# Altium PCB S6XT10W.PcbDoc (part 2 of 2)
Units mm, origin at the board's own origin, x right, y up, seen from the top; angles counter-clockwise.
Board outline 35 x 65.67 mm, 5 copper layers (Top Layer, Mid-Layer 2, Mid-Layer 6, Mid-Layer 13, Bottom Layer); 90 components, 58 nets, 296 pads, 188 vias.
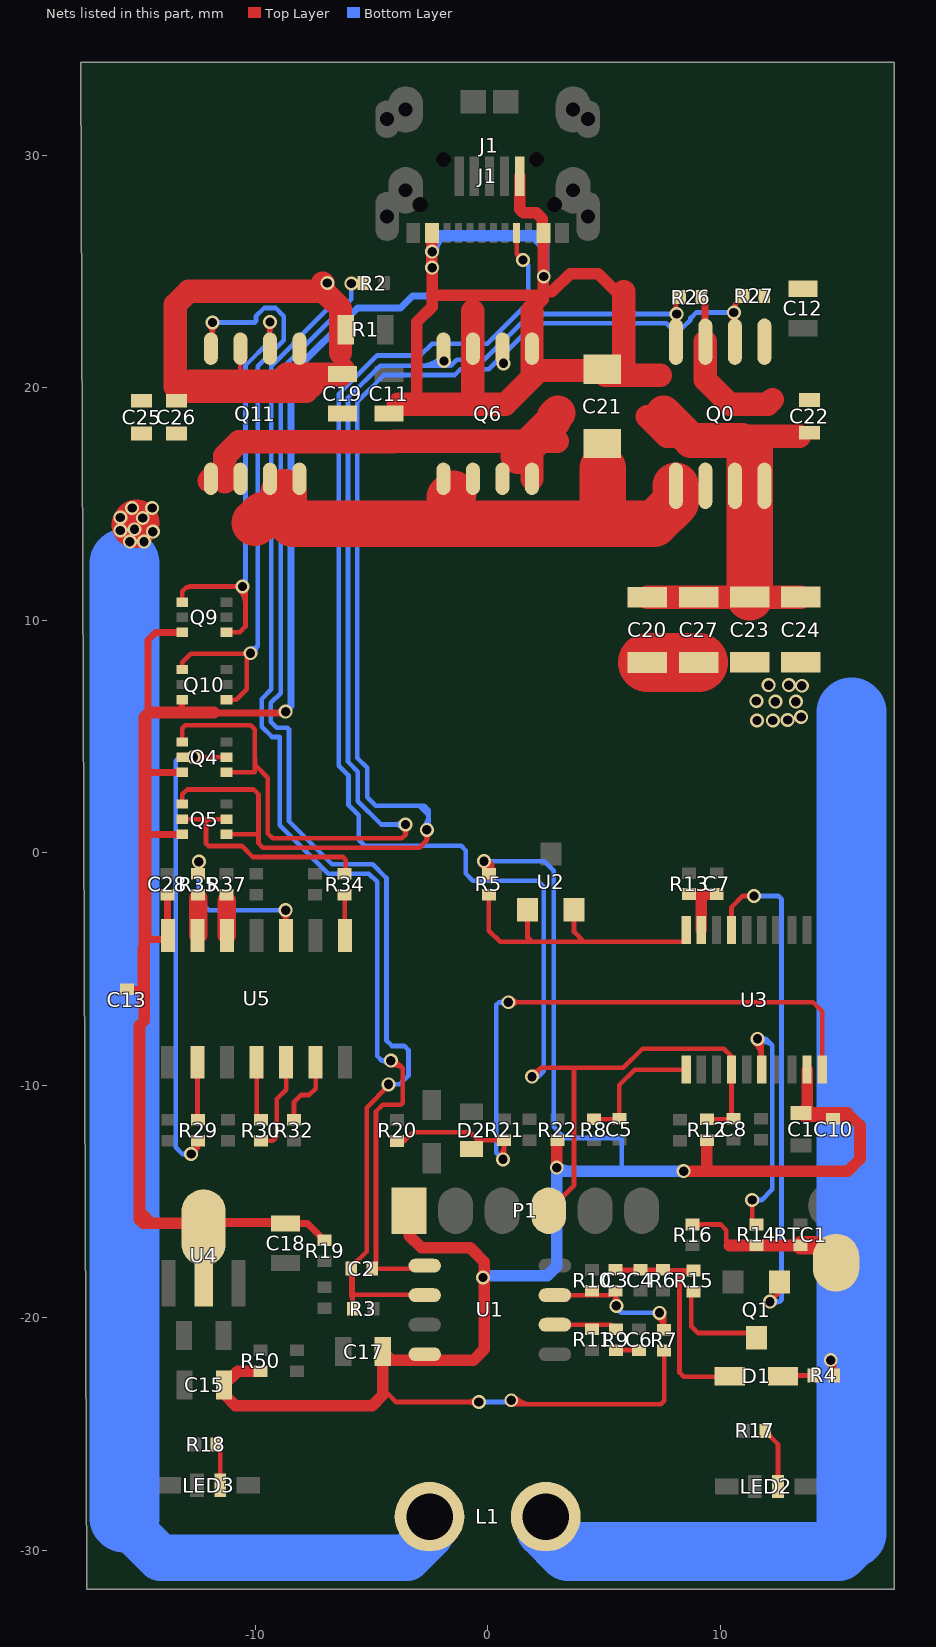
[diagram p3: the nets of this part, all layers, seen from the top]

## Via types
v1: diameter 0.6, hole 0.4, Top Layer to Bottom Layer, 188 vias

## Nets (pads, with @x,y where several pads share a name; then routed paths per layer and width w, separated by ;. In a path a pad name is that pad's centre, name@x,y a point inside that pad or via, vN(x,y) a via of type N, cw(c..) or ccw(c..) an arc to the next point about the centre after c; other vN are vias at no path point) (continued)
NetC2_2: C2.2 R2.1 R3.1 U1.6 | length 56.4
  Top Layer w0.2: v1(-5.86,24.486) -5.835,24.511 R2.1@-5.352,24.511 ccw(c-5.352,24.026) v1@-5.712,24.351 ; R3.1@-5.809,-19.609 -5.809,-19.13 -5.86,-19.079 ; v1@-5.719,24.627 ccw(c-5.439,24.907) R2.1@-5.439,24.511 ; v1@-4.267,-10.026 -5.201,-10.96 -5.201,-17.148 -5.86,-17.807 C2.2@-5.86,-17.882 ; U1.6@-2.707,-19.026 -2.725,-19.009 -5.79,-19.009 -5.809,-19.029 ; -5.86,-19.079 C2.2@-5.86,-17.882 ; -5.86,-19.079 -5.809,-19.029 ; C2.2@-5.86,-17.882 -5.809,-17.932 -5.809,-19.029
  Bottom Layer w0.2: v1(-5.86,24.486) -5.86,23.819 -8.906,20.773 -8.906,6.867 -9.322,6.452 -9.322,5.643 -9.065,5.385 -8.611,5.385 -8.544,5.319 -8.544,1.356 -6.693,-0.495 -4.94,-0.495 -4.352,-1.083 -4.352,-8.068 -4.115,-8.306 -3.581,-8.306 -3.405,-8.482 -3.405,-9.582 -3.78,-9.957 v1(-4.267,-9.957)
NetC3_1: C3.1 C4.2 D1.2 R6.2 R15.1 | length 12.2
  Top Layer w0.2: R6.2@7.645,-17.835 R6.2@7.543,-17.937 C4.2@6.568,-17.937 C3.1@5.493,-17.937 5.521,-17.965 R15.1@8.578,-17.965 ; R15.1@8.763,-17.965 R15.1@8.578,-17.965 ; D1.2@10.417,-22.504 10.392,-22.53 8.433,-22.53 8.255,-22.352 8.255,-18.288 R15.1@8.578,-17.965
NetC3_2: C3.2 R7.2 R10.1 U1.3 | length 8.9
  Top Layer w0.2: U1.3@2.893,-19.026 5.303,-19.026 C3.2@5.493,-18.837 5.493,-19.158 ; v1@5.396,-19.34 ccw(c5.161,-19.106) 5.493,-19.106 ; v1@5.412,-19.326 ccw(c5.278,-19.158) 5.493,-19.158 ; C3.2@5.493,-18.892 ccw(c6.127,-18.892) v1@5.679,-19.34 ; v1(5.537,-19.482) 5.537,-19.202 5.493,-19.158 ; v1@5.592,-19.289 cw(c5.629,-19.158) 5.493,-19.158 ; v1@7.282,-19.954 cw(c6.902,-20.533) R7.2@7.595,-20.533 ; R7.2@7.595,-20.505 v1@7.595,-19.99 ; 7.595,-20.163 ccw(c7.145,-20.163) v1(7.391,-19.787) v1@7.595,-19.99 ; v1@7.595,-19.964 v1@7.595,-19.99
  Bottom Layer w0.2: v1@5.537,-19.682 cw(c5.537,-19.919) 5.705,-19.751 ; v1(5.537,-19.482) 5.537,-19.583 5.74,-19.787 ; v1@5.712,-19.579 ccw(c5.863,-19.664) 5.74,-19.787 ; v1(7.391,-19.787) 5.74,-19.787
NetC5_2: C5.2 R8.1 U3.1 | length 5.7
  Top Layer w0.2: R8.1@4.572,-11.463 5.639,-11.463 C5.2@5.664,-11.437 5.664,-9.987 6.326,-9.325 U3.1@8.54,-9.325
NetC6_2: C6.2 R9.1 | length 1
  Top Layer w0.2: R9.1@5.518,-21.387 C6.2@6.518,-21.387
NetC7_1: C7.1 R13.1 U3.19 | length 2.8
  Top Layer w0.2: R13.1@8.661,-1.771 9.246,-1.771 9.19,-1.826
  Top Layer w0.5: U3.19@9.19,-3.325 9.19,-1.826 ; 9.246,-1.771 C7.1@9.855,-1.771
NetC20_2: C20.2 C22.1 C23.2 C24.2 C26.2 C27.2 Q0.C1 Q6.C1 Q11.C2 | length 45.6
  Top Layer w1: Q11.C2@-11.989,16.004 Q11.C2@-11.905,16.088 ; -11.303,15.951 -11.303,17.069 -10.693,17.678 -4.064,17.678 -4.042,17.7 1.8,17.7 ; Q6.C1@1.905,16.088 1.905,17.551 1.854,17.602 1.778,17.678 1.8,17.7 ; 2.87,18.771 1.8,17.7 ; 2.991,17.7 1.952,17.7 1.8,17.7 ; 6.858,18.771 7.71,17.918 8.574,17.918 C22.1@13.411,17.918 ; C20.2@6.87,10.993 6.876,10.999 C23.2@11.27,10.998 C24.2@13.47,10.999 ; 10.998,17.678 11.27,17.406
  Top Layer w1.5: 1.295,17.043 1.854,17.602 1.952,17.7 2.837,18.585 ; 2.87,18.771 3.023,18.923 ; 7.569,18.923 8.574,17.918 8.754,17.738 10.939,17.738 10.998,17.678
  Top Layer w2: C23.2@11.27,10.998 11.27,17.406
NetD1_1: D1.1 R4.1 | length 1.3
  Top Layer w0.2: D1.1@12.707,-22.504 12.732,-22.479 R4.1@14.003,-22.479
NetFU1_1: 
NetLED2_1: LED2.1 R17.2 | length 2.6
  Top Layer w0.2: R17.2@11.939,-24.867 11.939,-24.885 12.489,-25.435 LED2.1@12.489,-27.254
NetLED3_1: LED3.1 R18.2 | length 1.8
  Top Layer w0.2: R18.2@-11.666,-25.445 -11.5,-25.61 LED3.1@-11.5,-27.203
NetQ1_C: Q1.C R15.2 | length 4.5
  Top Layer w0.2: R15.2@8.763,-18.865 8.763,-20.371 9.042,-20.65 11.348,-20.65 Q1.C@11.557,-20.86
NetQ9_1: Q9.1 Q9.4 Q11.B1 | length 20.7
  Top Layer w0.2: Q9.4@-13.133,10.785 -13.133,11.251 -12.954,11.43 -12.852,11.43 -12.827,11.455 -10.414,11.455 -10.414,9.739 -10.668,9.485 Q9.1@-11.233,9.485 ; v1@-10.682,11.314 cw(c-11.33,10.666) -10.414,10.666 ; v1(-10.541,11.455) cw(c-10.848,11.149) -10.414,11.149 ; v1@-9.506,22.693 cw(c-9.848,22.352) -9.365,22.352 cw(c-8.882,22.352) v1@-9.224,22.693 ; Q11.B1@-9.365,21.688 v1(-9.365,22.835)
  Bottom Layer w0.2: v1@-10.414,11.455 -10.414,20.963 -9.365,22.012 v1(-9.365,22.835)
NetQ10_1: Q10.1 Q10.4 Q11.B2 | length 27.1
  Top Layer w0.2: Q10.4@-13.133,7.889 -13.133,8.203 -12.776,8.56 -10.363,8.56 -10.363,7.036 -10.81,6.589 Q10.1@-11.233,6.589 ; v1@-11.978,22.668 cw(c-12.319,22.326) -11.836,22.326 cw(c-11.354,22.326) v1@-11.695,22.668 ; Q11.B2@-11.905,21.688 -11.836,21.757 v1(-11.836,22.809)
  Bottom Layer w0.2: v1(-11.836,22.809) -10.016,22.809 -9.965,22.86 -9.965,23.083 -9.614,23.435 -9.116,23.435 -8.765,23.083 -8.765,22.046 -9.881,20.93 -9.881,8.902 ; v1(-10.198,8.585) -9.881,8.902 ; v1@-10.187,8.785 ccw(c-10.165,9.187) -9.881,8.902 ; v1@-9.998,8.596 cw(c-9.596,8.618) -9.881,8.902
NetR5_2: R5.2 U2.2 U2.3 U3.20 | length 13.7
  Top Layer w0.2: R5.2@0.051,-1.796 0.051,-3.342 0.533,-3.825 1.905,-3.825 ; U2.2@1.718,-2.445 1.718,-3.638 1.905,-3.825 ; U2.3@3.718,-2.445 3.718,-3.403 4.14,-3.825 ; U3.20@8.54,-3.325 8.54,-3.692 8.407,-3.825 4.14,-3.825 ; 1.905,-3.825 4.14,-3.825
NetR9_2: R9.2 R11.2 U1.2 | length 2.7
  Top Layer w0.2: U1.2@2.893,-20.296 5.328,-20.296 R9.2@5.518,-20.487
NetR14_1: pad.1@14.986,-17.628 R14.1 R16.2 RTC1.2 | length 6.9
  Top Layer w0.2: R16.2@8.814,-15.984 10.015,-15.984 10.262,-16.231 10.262,-16.764 10.389,-16.891 ; RTC1.2@13.455,-16.891 RTC1.2@13.462,-16.884 ; 14.101,-16.884 pad.1@14.732,-17.515
  Top Layer w0.5: 10.389,-16.891 RTC1.2@13.455,-16.891
  Top Layer w0.8: RTC1.2@13.462,-16.884 14.101,-16.884
NetR29_1: R29.1 U5.2 | length 2.5
  Top Layer w0.2: U5.2@-12.477,-9.006 -12.477,-11.463 R29.1@-12.452,-11.488
NetR30_1: R30.1 U5.4 | length 2.6
  Top Layer w0.2: U5.4@-9.937,-9.006 -9.937,-11.305 R30.1@-9.754,-11.488
NetR30_2: R30.2 U5.5 | length 3.7
  Top Layer w0.2: R30.2@-9.754,-12.388 -9.238,-12.388 -9.068,-12.217 -9.068,-10.586 -8.667,-10.185 U5.5@-8.667,-9.398
NetR32_1: R32.1 U5.6 | length 3.1
  Top Layer w0.2: R32.1@-8.331,-11.488 -8.331,-10.731 -8.014,-10.414 -7.671,-10.414 -7.397,-10.14 U5.6@-7.397,-9.006
NetR34_1: R34.1 U5.8 | length 1.8
  Top Layer w0.2: R34.1@-6.152,-1.806 -6.152,-3.531 U5.8@-6.127,-3.556
NetR35_1: R35.1 U5.10 | length 8.7
  Top Layer w0.2: v1@-12.562,-0.522 cw(c-12.828,-0.789) R35.1@-12.452,-0.789 ; v1(-12.421,-0.381) -12.452,-0.412 R35.1@-12.452,-0.906 cw(c-11.939,-0.906) v1@-12.285,-0.528 ; v1@-8.828,-2.605 cw(c-9.231,-3.008) U5.10@-8.661,-3.008 ; U5.10@-8.667,-3.556 -8.661,-3.55 v1@-8.661,-2.464 ; U5.10@-8.661,-2.885 cw(c-8.265,-2.885) v1@-8.545,-2.605
  Bottom Layer w0.2: v1(-12.421,-0.381) -12.421,-2.032 -11.989,-2.464 v1(-8.687,-2.464)
NetR35_2: R35.2 U5.13 | length 1.6
  Top Layer w0.3: U5.13@-12.477,-3.556 U5.13@-12.452,-3.531
  Top Layer w0.8: U5.13@-12.452,-3.531 R35.2@-12.452,-1.956
NetR37_1: R37.1 U5.12 | length 1.5
  Top Layer w0.3: U5.12@-11.227,-3.536 U5.12@-11.207,-3.556
  Top Layer w0.8: U5.12@-11.227,-3.536 -11.227,-2.057
NRST: C8.1 J1.9 P1.4 R12.2 U3.4 | length 72.3
  Top Layer w0.2: J1.9@1.25,26.661 1.25,25.776 ; v1@1.327,25.535 ccw(c1.055,25.581) 1.25,25.776 ; v1@1.491,25.699 cw(c1.445,25.97) 1.25,25.776 ; v1(1.524,25.502) 1.25,25.776 ; v1(1.905,-9.627) 2.286,-9.246 3.718,-9.246 ; v1@1.905,-9.427 ccw(c1.905,-8.944) 2.246,-9.285 ccw(c2.588,-9.627) v1@2.105,-9.627 ; P1.4@2.626,-15.392 3.718,-14.3 3.718,-9.246 ; R12.2@9.43,-11.463 10.385,-11.463 C8.1@10.49,-11.357 ; C8.1@10.578,-11.445 C8.1@10.49,-11.357 ; 3.718,-9.246 5.84,-9.246 6.66,-8.425 10.165,-8.425 10.49,-8.751 U3.4@10.49,-9.325 C8.1@10.49,-11.357
  Bottom Layer w0.2: v1(1.524,25.502) v1@1.651,25.375 ; v1@1.651,25.508 v1@1.651,25.375 ; v1@2.004,-9.453 ccw(c2.173,-9.158) 2.413,-9.398 ; 2.228,-9.583 cw(c2.038,-9.394) v1(1.905,-9.627) 2.184,-9.627 2.413,-9.398 ; v1@1.651,25.375 1.753,25.273 1.753,23.665 -0.017,21.895 -2.39,21.895 -2.891,21.394 -4.75,21.394 -6.406,19.738 -6.406,3.749 -5.982,3.325 -5.982,2.056 -5.547,1.621 -5.547,0.568 -5.283,0.305 -1.143,0.305 -0.94,0.102 -0.94,-0.889 -0.635,-1.194 2.159,-1.194 2.413,-1.448 2.413,-9.398
QC20: D2.1 R20.1 R21.2 U3.10 | length 31.7
  Top Layer w0.2: R20.1@-3.895,-12.392 -3.578,-12.392 -3.2,-12.014 -0.762,-12.014 -0.415,-12.361 ; D2.1@-0.695,-12.741 -0.695,-12.641 -0.415,-12.361 ; v1@0.519,-13.041 ccw(c0.07,-12.592) R21.2@0.705,-12.592 ; v1@0.705,-13.101 R21.2@0.705,-12.361 -0.415,-12.361 ; 0.705,-12.807 ccw(c1.036,-12.807) v1@0.802,-13.041 ; v1(0.889,-6.426) 13.995,-6.426 14.39,-6.821 U3.10@14.39,-9.325 ; v1@1.03,-6.568 cw(c1.372,-6.909) 1.372,-6.426 cw(c1.372,-5.943) v1@1.03,-6.285
  Bottom Layer w0.2: v1(0.66,-13.183) 0.378,-12.9 0.378,-6.538 0.489,-6.426 ; v1@0.729,-6.546 ccw(c0.489,-6.725) 0.489,-6.426 ; v1@0.729,-6.306 cw(c0.489,-6.127) 0.489,-6.426 ; v1(0.889,-6.426) 0.489,-6.426
RUN_POWER: R14.2 U3.6 | length 14
  Top Layer w0.2: v1(11.379,-14.935) 11.379,-15.806 R14.2@11.557,-15.984 ; v1@11.466,-8.142 cw(c10.684,-8.925) U3.6@11.79,-8.925 ; U3.6@11.79,-9.325 11.79,-8.184 v1(11.608,-8.001) cw(c11.167,-8.442) 11.79,-8.442
  Bottom Layer w0.2: v1(11.379,-14.935) 11.786,-14.935 ; v1@11.538,-15.057 cw(c11.786,-15.248) 11.786,-14.935 ; v1@11.538,-14.813 ccw(c11.786,-14.622) 11.786,-14.935 ; v1@11.692,-8.182 cw(c11.897,-8.626) 12.243,-8.28 ; v1@11.779,-8.105 cw(c11.964,-8.217) 11.964,-8.001 ; v1@11.779,-7.897 ccw(c11.964,-7.785) 11.964,-8.001 ; 12.04,-8.078 ccw(c11.769,-8.349) v1(11.608,-8.001) 11.964,-8.001 ; 11.786,-14.935 12.243,-14.478 12.243,-8.28 ; 11.964,-8.001 12.243,-8.28
SBWTDIO: 
SIGN: C20.1 C23.1 C24.1 C27.1 L1.2 R4.2 | length 53.8
  Top Layer w0.2: v1@14.64,-21.981 cw(c14.268,-22.495) R4.2@14.903,-22.495 ; R4.2@14.903,-22.479 14.903,-21.964 v1(14.757,-21.819) cw(c14.551,-22.103) 14.903,-22.103
  Top Layer w2.54: C20.1@6.87,8.193 C27.1@9.071,8.193
  Bottom Layer w2.54: L1.2@2.5,-28.551 2.5,-29.091 3.463,-30.054 15.088,-30.054 15.879,-29.262
  Bottom Layer w3: 15.646,-29.261 15.646,6.045
  other v1: 11.582,5.69 12.268,5.69 12.903,5.715 13.487,5.842 12.375,6.502 13.259,6.502 11.557,6.528 13.513,7.188 12.09,7.214 12.954,7.214
SWITCH: Q1.B U3.17 | length 22.8
  Top Layer w0.2: U3.17@10.49,-3.325 10.49,-2.337 10.973,-1.854 v1(11.455,-1.854) ; v1(12.141,-19.304) 12.557,-18.888 Q1.B@12.557,-18.46
  Bottom Layer w0.2: v1(11.455,-1.854) 12.497,-1.854 12.643,-2 12.643,-19.228 12.567,-19.304 ; v1(12.141,-19.304) 12.567,-19.304 ; v1@12.295,-19.432 cw(c12.567,-19.657) 12.567,-19.304 ; v1@12.295,-19.176 ccw(c12.567,-18.951) 12.567,-19.304
TX_GND: C2.1 C19.2 C25.1 C26.1 Q11.E1 Q11.E2 R1.2 U1.5 | length 83.8
  Top Layer w0.2: Q11.E2@-10.635,21.688 -10.635,20.288 -10.635,19.893 -10.592,19.85 ; v1(-4.166,-8.941) -3.988,-8.941 -3.658,-9.271 -3.658,-10.766 -3.734,-10.842 -4.5,-10.842 -4.508,-10.833 -4.801,-11.125 -4.801,-17.722 C2.1@-4.96,-17.882 -2.832,-17.882 U1.5@-2.707,-17.756 ; v1@-4.122,-9.136 cw(c-4.013,-9.626) -3.658,-9.271
  Top Layer w1: -12.77,20.288 -10.635,20.288 -8.951,20.288 ; v1@-7.096,24.511 ccw(c-6.322,24.511) -6.87,23.964 ; -6.325,21.514 -6.325,23.419 -7.061,24.155 -12.852,24.155 -13.437,23.571 -13.437,20.041 -13.246,19.85 -10.592,19.85 -7.798,19.85 -7.533,20.115 -7.533,20.127 -7.372,20.288 ; C19.2@-6.198,20.777 C19.2@-6.375,20.6 ; -8.951,20.288 -7.372,20.288 ; -8.951,20.288 -8.639,20.6 C19.2@-6.375,20.6 ; -7.372,20.288 -7.123,20.537 C19.2@-6.437,20.537 ; C19.2@-6.437,20.537 -6.313,20.537 C19.2@-6.25,20.6 C19.2@-6.375,20.6 ; C19.2@-6.437,20.537 C19.2@-6.375,20.6
  Bottom Layer w0.2: v1(-6.896,24.511) -6.756,24.371 -6.756,23.535 -8.365,21.927 -8.365,21.88 -9.306,20.939 -9.306,7.033 -9.722,6.617 -9.722,5.432 -9.276,4.985 -8.944,4.985 -8.944,1.19 -6.859,-0.895 -5.105,-0.895 -4.752,-1.248 -4.752,-8.734 -4.755,-8.738 -4.552,-8.941 ; v1@-4.329,-9.056 ccw(c-4.552,-9.215) -4.552,-8.941 ; v1@-4.329,-8.825 cw(c-4.552,-8.667) -4.552,-8.941 ; v1(-4.166,-8.941) -4.552,-8.941
TX_VCC: C11.1 C12.1 C13.1 C18.1 C19.1 C21.2 C22.2 C28.2 J1.1@1.376,29.11 J1.2@-2.4,26.661 J1.11 Q0.E1 Q0.E2 Q4.6 Q5.6 Q6.E1 Q6.E2 Q9.6 Q10.6 R19.2 R26.1 R27.2 U4.Vin U5.14 | length 164.4
  Top Layer w0.3: C13.1@-15.519,-5.875 -14.986,-5.875 ; C28.2@-13.777,-1.806 -13.777,-3.526 U5.14@-13.747,-3.556 -13.925,-3.734 -14.427,-3.734 ; Q5.6@-13.133,0.798 -14.583,0.798 -14.605,0.776 ; Q4.6@-13.133,3.465 -14.547,3.465 -14.605,3.523 ; Q10.6@-13.133,6.589 -13.157,6.564 -13.157,6.036 -13.157,6.005 ; Q9.6@-13.133,9.485 -14.275,9.485 -14.605,9.154 -14.605,6.005 ; U4.Vin@-12.217,-16.123 -12.034,-15.939 C18.1@-8.687,-15.939 ; v1@-8.687,6.005 -13.157,6.005 ; R19.2@-7.01,-16.67 -7.741,-15.939 -8.306,-15.939 -8.396,-15.85 -14.402,-15.85 -14.869,-15.382 -14.869,-7.311 -14.869,-5.798 ; R26.1@9.188,23.901 9.188,23.782 9.347,23.622 9.347,22.006 Q0.E2@9.365,21.988 ; -14.986,-5.875 -14.91,-5.798 -14.91,-4.902 ; -14.986,-5.875 -14.946,-5.875 -14.869,-5.798 ; -14.91,-4.902 -14.91,-4.084 -14.769,-3.944 -14.56,-3.734 -14.427,-3.734 ; -14.91,-4.902 -14.869,-4.943 -14.869,-5.798 ; -14.605,0.776 -14.605,-3.556 -14.427,-3.734 ; -14.605,0.776 -14.605,3.523 ; -14.605,3.523 -14.605,6.005 ; -14.605,6.005 -13.157,6.005
  Top Layer w0.5: U4.Vin@-12.034,-15.939 -14.82,-15.939 -14.986,-15.773 -14.986,-7.428 -14.869,-7.311 -14.769,-7.211 -14.769,-3.944 -14.769,5.841 -14.605,6.005 -14.574,6.036 -13.157,6.036 -11.766,6.036 ; -2.87,19.3 -3.048,19.478 -3.048,22.835 -2.388,23.495 -2.388,23.978 ; -2.4,23.978 -2.388,23.978 ; v1@-2.4,25.171 J1.2@-2.4,26.661 ; v1(-2.388,25.171) -2.388,23.978 ; J1.1@1.376,29.11 1.376,27.684 1.524,27.536 2.086,27.536 2.35,27.272 2.35,26.711 J1.11@2.4,26.661 2.4,24.13 ; 1.905,23.306 2.4,23.801 2.4,24.13 ; 2.388,23.978 -2.388,23.978 ; 5.85,24.151 5.515,24.151 4.751,24.915 3.549,24.915 2.764,24.13 2.4,24.13
  Top Layer w1: -3.85,19.3 -2.87,19.3 -0.685,19.3 ; -0.635,23.306 Q6.E2@-0.635,21.688 -0.635,19.35 -0.685,19.3 ; 1.905,23.306 Q6.E1@1.905,21.688 1.905,20.75 2.212,20.75 ; C21.2@5.055,20.548 7.42,20.548 ; 5.85,24.151 5.85,22.5 5.85,21.1 5.5,20.75 2.212,20.75 ; Q0.E2@9.365,21.988 9.365,20.349 10.414,19.3 12.05,19.3 12.25,19.5 ; -0.685,19.3 0.762,19.3 2.212,20.75
  Bottom Layer w0.3: v1@-8.661,6.121 -8.456,6.327 -8.456,20.587 -5.599,23.444 -3.74,23.444 -3.239,23.945 -2.489,23.945 -2.388,24.046 v1(-2.388,25.171) ; v1@-2.494,25.065 cw(c-2.75,24.809) -2.388,24.809 cw(c-2.025,24.809) v1@-2.282,25.065
  Bottom Layer w0.5: v1(-2.388,25.857) -2.388,26.187 -2.032,26.543 2.032,26.543 2.413,26.162 v1(2.413,24.79) ; v1@-2.338,25.857 cw(c-1.42,25.857) -2.069,26.506
  other v1: -8.687,6.071
UA: Q0.B2 Q4.1 Q4.4 Q6.B2 R26.2 | length 58.2
  Top Layer w0.2: Q4.4@-13.133,4.765 -13.133,5.364 -13.01,5.486 -10.191,5.486 -10.014,5.309 -10.014,4.07 ; Q4.1@-11.233,3.465 -10.014,3.465 -10.014,3.734 ; v1@-3.66,1.067 cw(c-3.897,0.787) -3.531,0.787 cw(c-3.165,0.787) v1@-3.401,1.067 ; v1(-3.531,1.219) -3.531,0.787 -3.696,0.622 -9.246,0.622 -9.455,0.832 -9.455,3.232 -10.008,3.785 ; v1@7.987,23.034 cw(c7.725,22.772) Q0.B2@8.095,22.772 ; Q0.B2@8.095,21.988 8.095,23.709 R26.2@8.288,23.901 ; Q0.B2@8.095,22.612 cw(c8.691,22.612) v1@8.269,23.034 ; -10.014,3.734 -10.014,3.791 ; -10.014,3.734 -10.008,3.74 -10.008,3.785 ; -10.014,3.791 -10.008,3.785 ; -10.014,3.791 -10.014,4.07 ; -10.014,4.07 -10.008,4.064 -10.008,3.785
  Bottom Layer w0.2: v1@-3.672,1.078 ccw(c-4.013,0.736) -4.013,1.219 ccw(c-4.013,1.702) v1@-3.672,1.361 ; v1(-3.531,1.219) -4.579,1.219 -5.582,2.222 -5.582,3.491 -6.006,3.915 -6.006,19.572 -4.623,20.955 -1.582,20.955 -1.334,21.203 -0.144,21.203 1.829,23.175 v1(8.128,23.175) ; -2.853,20.955 ccw(c-2.853,22.132) v1@-2.021,21.3 ; -2.37,20.955 ccw(c-2.37,21.649) v1(-1.88,21.158)
UAB: Q0.B1 Q5.1 Q5.4 Q6.B1 R27.1 | length 59.6
  Top Layer w0.2: Q5.4@-13.133,2.098 -13.133,2.514 -12.922,2.724 -10.065,2.724 -9.855,2.515 -9.855,0.798 ; Q5.1@-11.233,0.798 -9.855,0.798 ; v1@-2.752,0.844 cw(c-3.039,0.533) -2.616,0.533 cw(c-2.194,0.533) v1@-2.48,0.844 ; v1(-2.616,0.991) -2.616,0.533 -2.927,0.222 -9.671,0.222 -9.855,0.406 -9.855,0.798 ; v1@10.45,23.1 cw(c10.005,22.654) Q0.B1@10.635,22.654 ; v1@10.527,23.43 ccw(c10.475,23.582) 10.635,23.582 ; Q0.B1@10.635,21.988 10.635,23.582 ; Q0.B1@10.635,22.862 cw(c10.97,22.862) v1@10.733,23.1 ; v1@10.722,23.393 cw(c10.884,23.582) 10.635,23.582 ; R27.1@11.005,23.952 10.635,23.582
  Bottom Layer w0.2: v1@-2.753,1.137 ccw(c-3.208,1.626) -2.54,1.626 ; v1(-2.616,0.991) -2.591,0.991 -2.54,0.94 -2.54,1.626 ; -2.54,1.289 ccw(c-2.317,1.289) v1@-2.475,1.132 ; v1(10.592,23.241) 8.966,23.241 8.728,23.003 8.728,22.926 8.377,22.575 7.879,22.575 7.679,22.775 2.023,22.775 0.051,20.803 -1.168,20.803 -1.416,20.555 -4.458,20.555 -5.606,19.406 -5.606,4.081 -5.182,3.656 -5.182,2.388 -4.816,2.022 -2.937,2.022 ; -2.937,2.022 -2.734,2.022 -2.54,1.829 -2.54,1.626 ; -2.937,2.022 -2.54,1.626
  other v1: 0.686,21.057
UP-A: Q4.2 Q4.5 R29.2 | length 23.5
  Top Layer w0.2: v1@-12.791,3.973 ccw(c-13.132,3.632) Q4.5@-13.133,4.115 ; v1@-12.791,4.256 cw(c-13.132,4.598) Q4.5@-13.133,4.115 ; v1(-12.751,-12.954) -12.452,-12.655 ; v1@-12.731,-12.755 ccw(c-12.697,-12.41) -12.452,-12.655 ; v1@-12.552,-12.934 cw(c-12.206,-12.9) -12.452,-12.655 ; v1@-12.508,3.973 cw(c-12.166,3.632) -12.166,4.115 cw(c-12.166,4.598) v1@-12.508,4.256 ; R29.2@-12.452,-12.388 -12.452,-12.655 ; Q4.2@-11.233,4.115 Q4.5@-13.133,4.115
  Bottom Layer w0.2: v1@-12.916,-13.067 ccw(c-13.131,-13.216) -13.131,-12.954 ; v1@-12.916,-12.841 cw(c-13.131,-12.692) -13.131,-12.954 ; v1(-12.751,-12.954) -13.131,-12.954 ; v1(-12.649,4.115) -13.269,4.115 -13.421,3.962 -13.421,-12.664 -13.131,-12.954
UP-B: Q5.2 Q5.5 R34.2 | length 9.9
  Top Layer w0.2: Q5.5@-13.133,1.448 -12.116,1.448 ; Q5.2@-11.233,1.448 -12.116,1.448 ; R34.2@-6.152,-0.906 -6.096,-0.85 -6.096,-0.305 -6.223,-0.178 -10.109,-0.178 -10.585,0.298 -12.007,0.298 -12.116,0.406 -12.116,1.448
VCC: C1.2 C10.2 C15.2 C17.2 P1.1 R5.1 R7.1 R12.1 R22.2 R50.2 U1.8 U3.9 | length 94
  Top Layer w0.2: -4.509,-23.19 -4.369,-23.19 -3.937,-23.622 v1(-0.381,-23.622) ; v1@-0.522,-23.763 ccw(c-0.864,-24.105) -0.864,-23.622 ccw(c-0.864,-23.139) v1@-0.522,-23.481 ; v1@1.157,-23.404 ccw(c1.928,-22.634) 1.928,-23.724 ; 1.445,-23.724 cw(c1.445,-23.117) v1(1.016,-23.546) 1.016,-23.622 0.914,-23.724 7.442,-23.724 7.595,-23.571 R7.1@7.595,-21.405
  Top Layer w0.5: R50.2@-9.779,-22.294 -10.751,-22.294 C15.2@-11.342,-22.885 -11.342,-23.278 -10.846,-23.774 -4.966,-23.774 -4.509,-23.318 -4.509,-23.19 C17.2@-4.509,-21.45 -4.141,-21.819 -0.61,-21.819 -0.144,-21.353 -0.144,-17.599 -0.75,-16.993 -2.845,-16.993 -3.374,-16.463 P1.1@-3.374,-15.392 ; v1@-0.186,-0.392 cw(c-0.684,-0.933) R5.1@0.051,-0.933 ; v1(-0.152,-0.356) 0.051,-0.559 R5.1@0.051,-0.896 ; v1(2.972,-13.538) 2.972,-12.394 R22.2@3.005,-12.361 ; v1(8.433,-13.691) 9.449,-13.691 ; R12.1@9.43,-12.363 9.43,-13.671 9.449,-13.691 ; U3.9@13.74,-9.325 13.74,-10.934 C1.2@13.487,-11.187 ; 9.449,-13.691 15.494,-13.691 16.018,-13.167 16.018,-11.725 15.48,-11.187 15.207,-11.187 ; C1.2@13.487,-11.187 15.207,-11.187 ; C1.2@13.487,-11.187 13.629,-11.328 15.348,-11.328 15.207,-11.187
  Bottom Layer w0.2: v1(-0.381,-23.622) 0.94,-23.622 v1(1.016,-23.546) ; v1(-0.152,-0.356) 2.438,-0.356 2.845,-0.762 2.845,-11.786 3.327,-12.268 5.74,-12.268 5.766,-12.294 5.766,-13.691
  Bottom Layer w0.5: v1(-0.203,-18.263) -0.127,-18.186 2.565,-18.186 2.972,-17.78 v1(2.972,-13.538) 3.124,-13.691 5.766,-13.691 v1(8.433,-13.691) ; v1@-0.168,-18.298 cw(c0.101,-18.567) 0.101,-18.186 ; v1@3.007,-13.503 ccw(c3.46,-13.05) 3.46,-13.691
VSW: C21.1 C25.2 L1.1 Q0.C2 Q6.C2 Q11.C1 | length 81
  Top Layer w2: v1@-15.189,14.122 v1@-15.124,14.188 ; -10.014,14.188 -9.673,14.529 -8.763,14.529 ; -8.763,15.519 -8.763,14.529 ; L1.1@-2.5,-28.551 L1.1@-2.159,-28.892 ; -1.473,15.443 -1.626,15.291 -1.626,14.148 ; 4.953,16.535 4.953,14.326 4.775,14.148 ; Q0.C2@8.095,15.788 8.095,15.08 7.163,14.148 4.775,14.148 ; -8.763,14.529 -8.382,14.148 -1.626,14.148 ; -1.626,14.148 4.775,14.148
  Bottom Layer w2: -15.723,-28.673 -14.072,-30.324 -3.464,-30.324 -2.5,-29.359 L1.1@-2.5,-28.551
  Bottom Layer w3: -15.621,-28.6 -15.621,12.442
  other v1: -15.392,13.386 -14.783,13.386 -14.402,13.818 -15.799,13.868 -15.189,13.919 -14.834,14.402 -15.799,14.427 -15.291,14.834 -14.427,14.834
pads on no net: J1. J1.4@-0.574,29.11 J1.10 J1.22@2.88,27.876
copper on no net: | length 0.2
  Mid-Layer 13 w0.05: -325.238,-29.284 ccw(c-325.213,-29.284) -325.188,-29.284 ccw(c-325.213,-29.284) -325.238,-29.284

## Polygon pours and split planes (outlines as drawn)
GND on Top Layer "Top Layer-No Net" (solid, remove dead copper, pour order 12): 0.816,32.244 0.751,32.309 0.751,34.054 4.985,34.054 5.095,33.944 5.171,33.868 5.171,29.703 5.298,29.044 5.603,28.306 6.212,27.671 6.797,27.391 7.482,27.232 8.524,27.417 9.413,28.124 9.868,28.915 9.946,29.601 10.022,31.633 17.541,31.531 17.54,-31.739 -17.41,-31.791 -17.46,31.506 -9.891,31.531 -9.84,29.474 -9.612,28.509 -9.205,27.95 -8.545,27.493 -7.783,27.239 -6.691,27.391 -5.929,27.848 -5.37,28.534 -5.16,29.652 -5.116,34.021 0.745,34.046
NetC20_2 on Top Layer "Top Layer-No Net" (solid, remove dead copper, pour order 10): -13.386,18.045 -13.061,18.37 -13.061,18.542 -3.702,18.542 -3.524,18.72 1.651,18.72 1.803,18.872 2.797,19.865 2.845,19.865 2.861,19.849 7.817,19.849 7.998,19.849 9.151,18.696 9.184,18.664 14.244,18.664 14.356,18.664 14.605,18.415 14.605,18.313 14.605,10.135 14.427,9.957 14.402,9.931 14.326,9.931 4.696,9.931 4.493,10.135 4.547,10.188 4.547,12.37 4.547,12.627 4.772,12.852 4.873,12.751 5.349,12.751 9.5,12.751 9.982,13.233 9.982,16.434 9.779,16.637 9.627,16.789 9.195,16.789 7.214,16.789 7.087,16.916 6.038,17.965 4.258,17.965 4.2,17.907 3.838,17.546 3.835,17.546 3.835,15.316 3.683,15.164 -0.102,15.164 -0.116,15.178 -0.203,15.265 -0.203,16.612 -0.402,16.811 -0.402,16.815 -9.855,16.815 -10.054,16.616 -10.109,16.561 -10.109,15.519 -10.109,15.493 -10.275,15.328 -13.053,15.328 -13.133,15.408 -14.133,16.408 -14.148,16.408 -14.148,18.186 -14.173,18.212 -14.3,18.339 -13.679,18.339 -13.386,18.045
VSW on Top Layer "Top Layer-No Net" (solid, remove dead copper, pour order 9): 9.373,16.637 9.779,16.637 9.982,16.434 9.982,16.205 9.982,13.233 9.601,12.852 -3.61,12.852 -4.017,12.446 -15.85,12.446 -16.18,12.776 -16.154,12.802 -16.154,12.852 -16.154,17.78 -15.596,18.339 -14.3,18.339 -14.173,18.212 -14.173,18.045 -14.173,16.434 -14.148,16.408 -13.03,15.291 -11.71,15.291 -10.338,15.291 -10.109,15.519 -10.058,15.57 -10.058,16.434 -10.058,16.612 -9.855,16.815 -9.83,16.815 -0.402,16.815 -0.25,16.662 -0.203,16.616 -0.203,16.51 -0.203,15.265 -0.102,15.164 -0.051,15.164 3.683,15.164 3.785,15.265 3.835,15.316 3.835,15.342 3.835,17.551 4.267,17.983 4.318,18.034 4.493,18.034 5.969,18.034 6.223,17.78 7.087,16.916 7.087,16.866 7.188,16.764 9.373,16.764
TX_GND on Top Layer "Top Layer-No Net" (solid, remove dead copper, pour order 8): -6.896,24.511 -6.502,24.511 -6.35,24.359 -5.918,23.927 -5.69,23.927 -5.537,23.927 -5.334,23.724 -5.334,19.609 -5.385,19.558 -5.455,19.558 -6.781,19.558 -6.858,19.481 -6.858,18.567 -6.883,18.542 -7.772,18.542 -15.24,18.542 -15.342,18.644 -15.342,18.669 -15.342,25.332 -15.189,25.484 -15.164,25.509 -15.164,25.527 -6.401,25.527 -6.248,25.375 -6.248,25.349 -6.248,24.511 -6.274,24.486 -6.553,24.486
TX_VCC on Top Layer "Top Layer-No Net" (solid, remove dead copper, pour order 7): 1.346,29.591 1.676,29.261 1.676,29.134 2.108,29.134 2.235,29.007 2.235,28.931 2.235,27.737 2.362,27.61 2.718,27.254 2.718,27 2.718,25.852 2.794,25.776 2.794,25.484 3.005,25.273 3.15,25.273 5.131,25.273 5.359,25.044 12.014,25.044 12.37,25.044 12.751,24.663 12.751,20.218 12.954,20.015 13.005,20.015 14.021,20.015 14.249,19.787 14.249,18.669 14.173,18.593 9.017,18.593 8.661,18.948 7.671,19.939 7.366,19.939 7.315,19.939 2.845,19.939 2.845,19.865 1.75,18.771 1.699,18.72 -3.524,18.72 -3.524,18.676 -3.632,18.567 -3.658,18.542 -6.858,18.542 -6.858,19.481 -6.806,19.533 -6.781,19.558 -6.655,19.558 -4.47,19.558 -4.191,19.837 -3.988,20.041 -3.607,20.041 -3.556,20.041 -3.505,20.091 -3.481,20.115 -3.48,20.115 -3.48,23.216 -3.073,23.622 -3.048,23.622 -3.073,23.622 -2.927,23.768 -2.927,23.782 -2.927,25.851 -2.819,25.959 -2.794,25.984 -2.794,26.187 -2.794,27.051 -2.667,27.178 -2.184,27.178 -2.083,27.076 -2.083,27.026 -2.083,24.536 -1.956,24.409 1.575,24.409 1.702,24.536 1.753,24.587 1.753,24.994 1.753,25.07 1.829,25.146 1.981,25.298 1.981,25.578 1.981,26.086 2.083,26.187 2.101,26.206 2.101,26.289 2.101,27.109 2.032,27.178 2.007,27.203 1.524,27.203 1.136,27.203 1.041,27.298 1.041,27.305 1.041,29.388 1.27,29.616
GND on Bottom Layer "Top Layer-No Net" (solid, remove dead copper, pour order 11): 0.776,32.31 0.711,32.375 0.711,34.12 4.945,34.12 5.055,34.011 5.131,33.934 5.131,29.769 5.258,29.11 5.563,28.372 6.172,27.737 6.756,27.457 7.442,27.298 8.484,27.483 9.373,28.19 9.828,28.981 9.906,29.667 9.982,31.699 17.501,31.598 17.5,-31.673 -17.45,-31.725 -17.501,31.572 -9.931,31.598 -9.881,29.54 -9.652,28.575 -9.246,28.016 -8.585,27.559 -7.823,27.305 -6.731,27.457 -5.969,27.915 -5.41,28.6 -5.201,29.718 -5.156,34.087 0.705,34.112

## Keep-outs
Keep-Out Layer:
  circle w0.1: c17.499,31.626 r0.05
  circle w0.1: c17.499,31.626 r0.05
  circle w0.1: c-17.501,31.626 r0.05
  circle w0.1: c17.499,31.626 r0.05
  lines w0.1: -9.901,29.676 ccw(c-7.551,29.676) -5.201,29.676 ; 5.199,29.676 ccw(c7.549,29.676) 9.899,29.676 ; -4.5,5.385 4.5,5.385 4.5,12.802 4.522,12.824 -4.498,12.824 -4.501,12.826 -4.501,5.385 -4.5,5.385
  lines w0.3: -9.901,29.676 -9.901,31.626 -17.501,31.626 -17.501,-31.674 ; -5.201,29.676 -5.201,34.126 5.199,34.126 5.199,29.676 ; 9.899,29.676 9.899,31.626 17.499,31.626 17.499,-31.674 -17.501,-31.674 ; -17.501,-31.674 -15.501,-31.674 -17.501,-31.674

## Other copper
Top Layer:
  region net TX_VCC: 14.732,25.044 12.37,25.044 12.37,23.481 14.732,23.481
  region net TX_VCC: 6.274,24.663 2.108,24.663 2.108,21.071 6.274,21.071
  region net NetC7_1: 10.121,-1.524 8.379,-1.524 8.379,-2.325 10.121,-2.325
  region net GND: 1.046,33.769 0.356,33.769 0.356,31.725 1.046,31.725
  region net SIGN: 14.179,9.296 11.303,9.296 11.303,5.182 14.179,5.182
  region net TX_GND: -6.375,24.681 -7.105,24.681 -7.105,24.155 -6.375,24.155
  region net SIGN: 14.179,9.55 5.563,9.55 5.563,6.909 14.179,6.909
  region net NetC20_2: 14.275,18.415 10.389,18.415 10.389,10.465 14.275,10.465
Bottom Layer:
  region net VSW: -14.148,15.138 -17.12,15.138 -17.12,12.442 -14.148,12.442
  region net SIGN: 17.12,7.722 11.278,7.722 11.278,5.207 17.12,5.207
  region net VSW: 0,-26.391 -16.688,-26.391 -16.688,-31.267 0,-31.267
  region net SIGN: 17.145,-26.365 0.533,-26.365 0.533,-31.267 17.145,-31.267

## Silkscreen, mask and mechanical layers (free items; w line width, h text height)
Top Overlay:
  lines w0.1: -3.61,34.128 3.59,34.128 3.59,28.126 3.556,28.092 -3.378,28.092 -3.56,28.274
  text "GND" at -16.343,27.254 h1
  text "GND" at 13.209,26.365 h1
  text "V+" at 1.718,22.695 h1
  text "BP-S6107W5AA0" at -7.438,2.557 h1.27
  text "2018-03-03" at -5.547,0.568 h1.27
Bottom Overlay:
  circle w0.3: c0,-0.051 r2.4
  lines w0.3: -17.31,-15.944 ccw(c0,-0.051) 17.283,-15.974 ; -17.299,-18.444 ccw(c0,-0.051) 17.49,-18.262 ; -17.281,15.875 cw(c0,-0.051) 17.263,15.894 ; -17.263,18.419 cw(c0.036,0.026) 17.526,18.237
  text "10W" at -5.15,-4.75 h1.27
  text "For" at -5.156,-7.523 h1.52
  text "Iphone X" at -5.334,-10.617 h1.52
  text "SANSUNG" at -5.156,-13.513 h1.52
Bottom Solder:
  rectangle: -5.103,-31.115 -0.559,-26.605
  rectangle: 0.866,-31.039 5.41,-26.528
  rectangle: -3.596,-30.264 -0.807,-26.922
Mechanical 4:
  drawing of 289 lines, arcs and shapes, not listed

## Text inside footprints (layer, text, board x,y; h text height)
LED2: Top Overlay "+" at 12.206,-26.7 h0.8; Top Overlay "B" at 10.368,-26.109 h0.6 r180; Top Overlay "G" at 11.65,-25.998 h0.6 r180; Top Overlay "R" at 13.856,-26.109 h0.6 r180
LED3: Top Overlay "+" at -11.783,-26.649 h0.8; Top Overlay "B" at -13.621,-26.058 h0.6 r180; Top Overlay "G" at -12.339,-25.947 h0.6 r180; Top Overlay "R" at -10.133,-26.058 h0.6 r180